# EAGLE board MD-board (EAGLE 9.6.2)
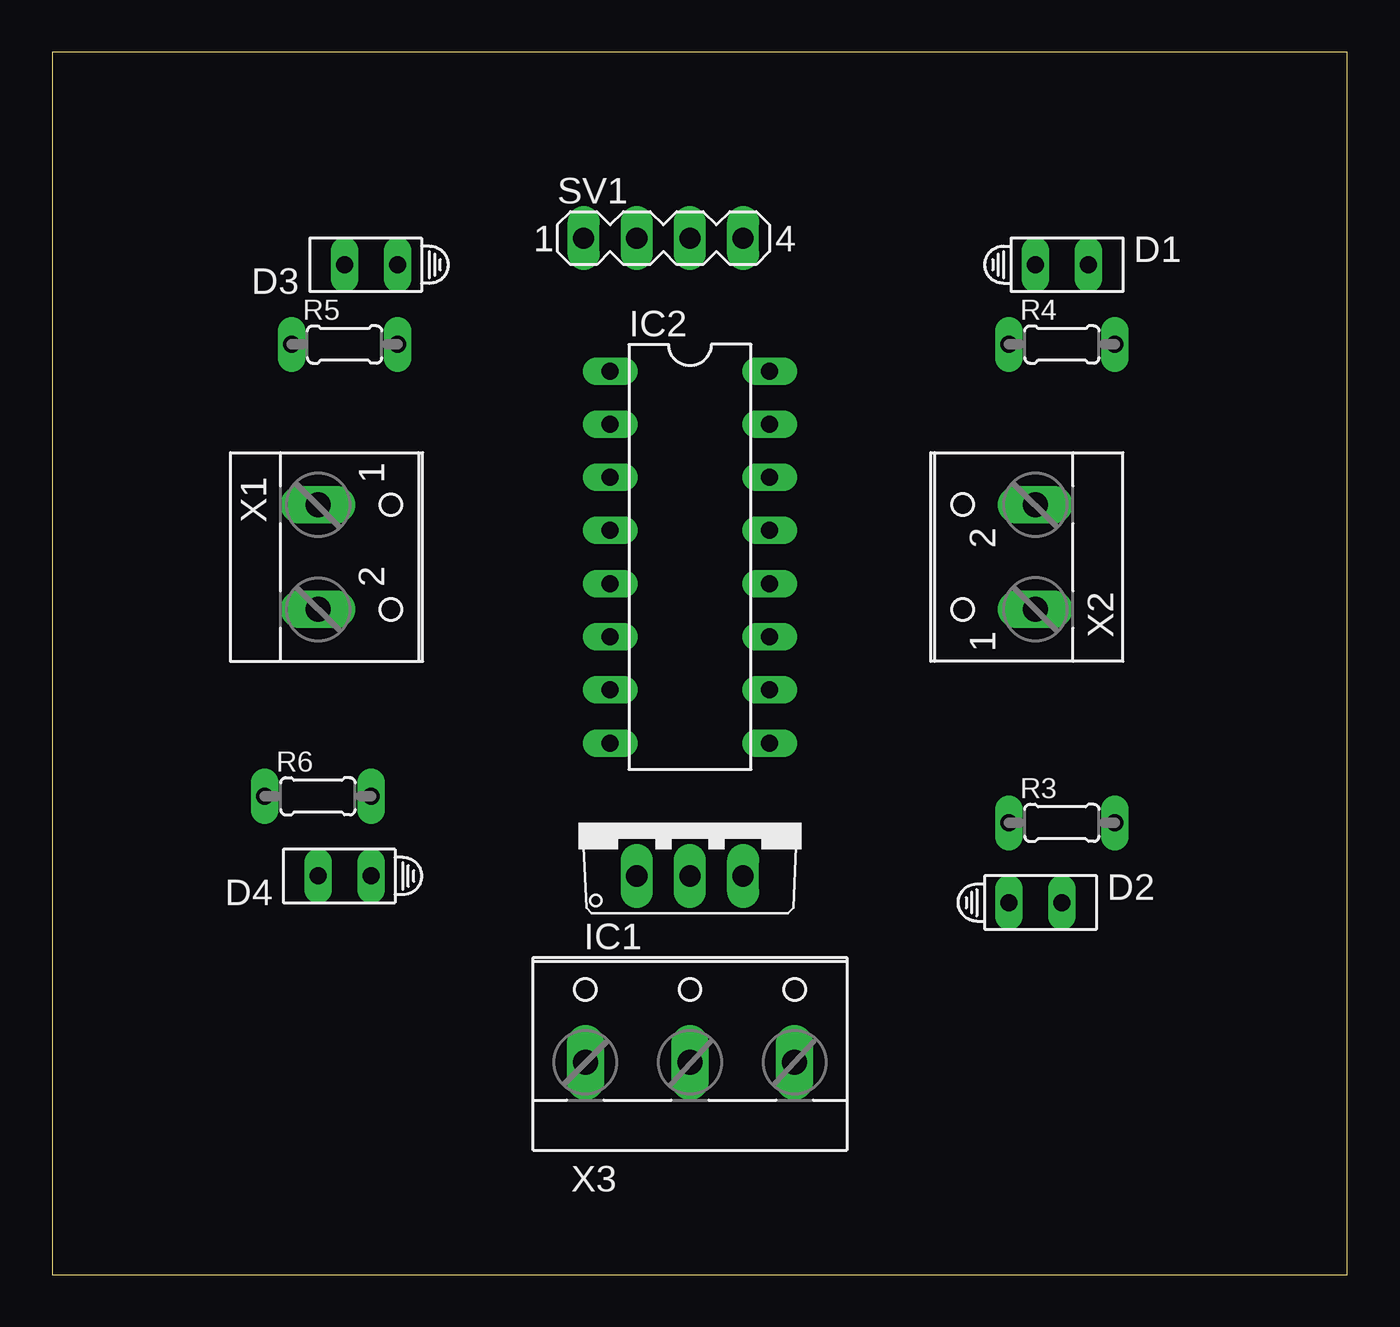
[diagram p0: board, top side]
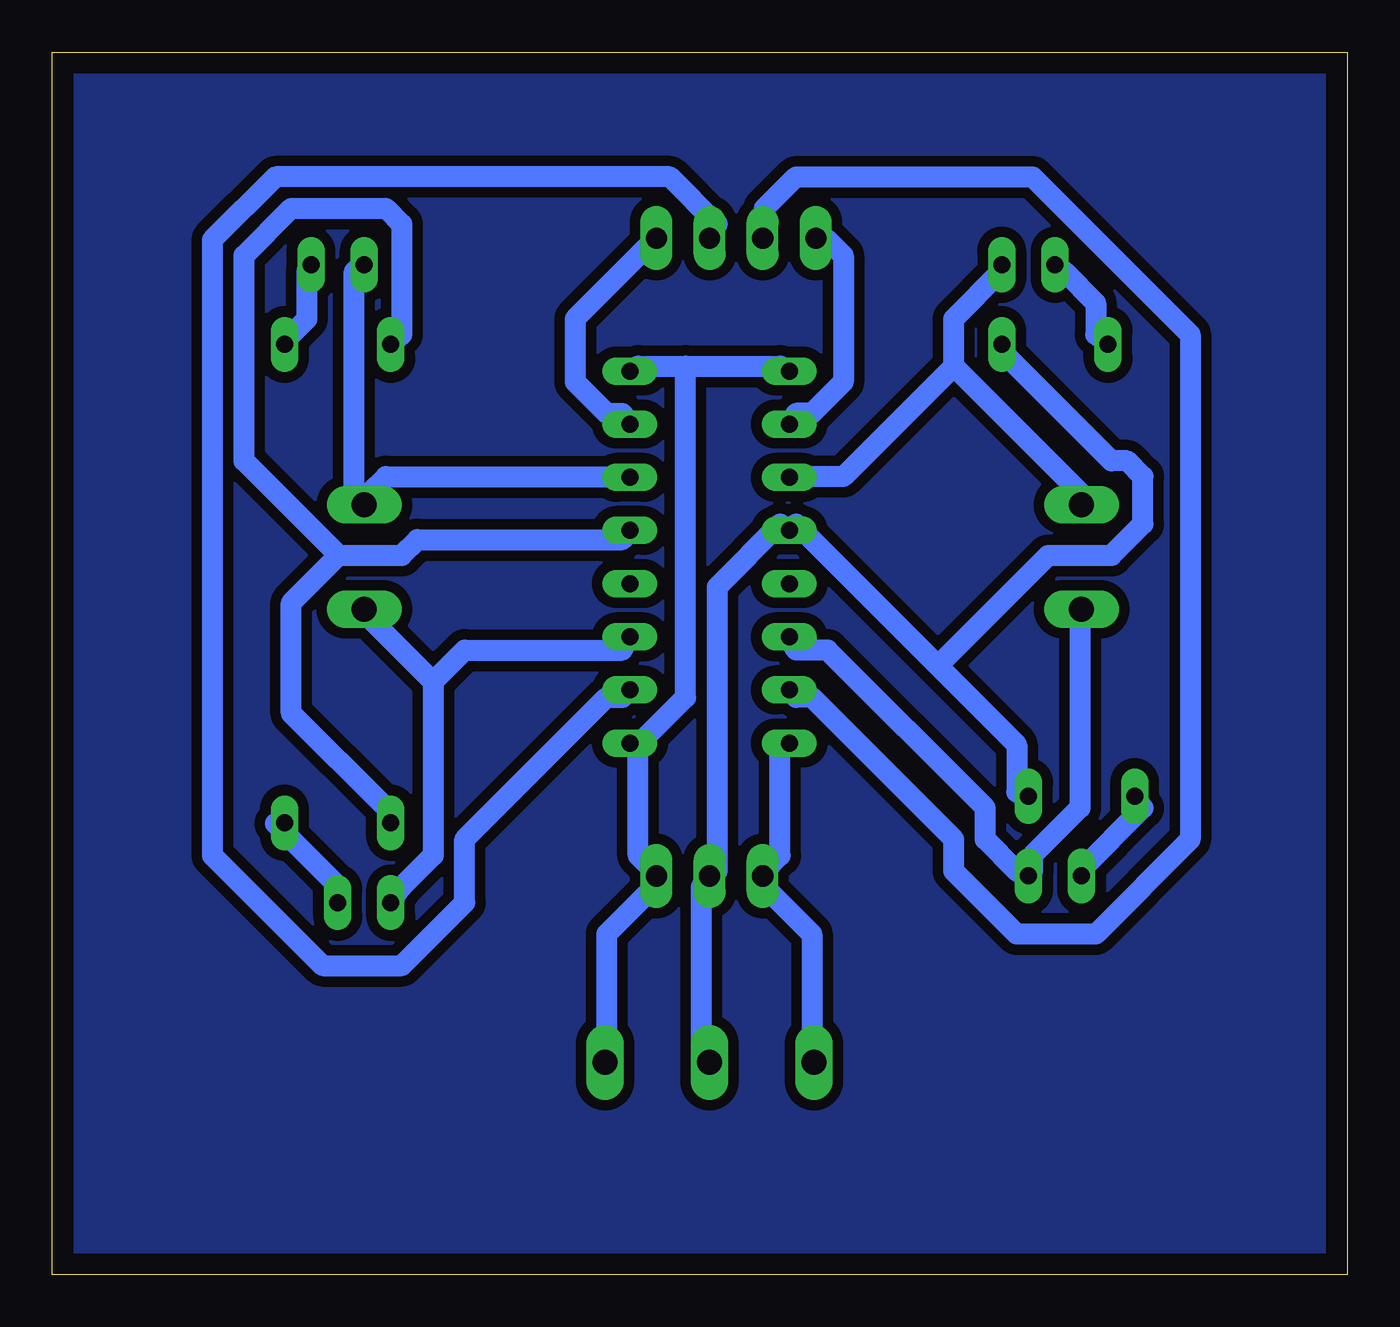
[diagram p1: board, bottom side, seen from below]

Size 61.9 x 58.41 mm. Coordinates in mm from the lower left corner, seen from the top.
Outline: 0,0 61.9,0 61.9,58.41 0,58.41 0,0
Copper layers (1*16): Top 0.035mm / dielectric 1.5mm / Bottom 0.035mm
Design rules "default *": minimum track width 20mil, minimum drill 0.35mm, track to track 20mil, track to pad 20mil, pad to pad 20mil, via to via 20mil, smd to smd 6mil, copper to edge 40mil, drill to drill 6mil, minimum pad ring 10mil, minimum via ring 8mil, stop-mask expansion 4mil, vias tented up to drill 0mil, thermal gap 10mil
Net classes: 0 default: width 1 mm, clearance 0.508 mm

## Footprints (pad centres in the part's own frame; a part is rotated, then mirrored left to right if it is on the bottom)
HLMP6 = drill 0.813 long: A -1.27,0; K 1.27,0
TO220V = drill 1.016 long: 1 -2.54,-2.54; 2 0,-2.54; 3 2.54,-2.54
DIL16 = drill 0.813 long: 1 -8.89,-3.81; 2 -6.35,-3.81; 3 -3.81,-3.81; 4 -1.27,-3.81; 5 1.27,-3.81; 6 3.81,-3.81; 7 6.35,-3.81; 8 8.89,-3.81; 9 8.89,3.81; 10 6.35,3.81; 11 3.81,3.81; 12 1.27,3.81; 13 -1.27,3.81; 14 -3.81,3.81; 15 -6.35,3.81; 16 -8.89,3.81
0204/5 = drill 0.813 long: 1 -2.54,0; 2 2.54,0
MA04-1 = drill 1.016 long: 1 -3.81,0; 2 -1.27,0; 3 1.27,0; 4 3.81,0
W237-102 = drill 1.194 long: 1 -2.5,-1.27; 2 2.5,-1.27
W237-103 = drill 1.194 long: 1 -5,-1.29; 2 0,-1.29; 3 5,-1.29

## Placement (x,y rotation side)
D1  HLMP6  [HLMP6]  48.26,48.26 0 top
D2  HLMP6  [HLMP6]  46.99,17.78 0 top
D3  HLMP6  [HLMP6]  15.24,48.26 180 top
D4  HLMP6  [HLMP6]  13.97,19.05 180 top
IC1  7805TV  [TO220V]  30.48,21.59 0 top
IC2  L293D  [DIL16]  30.48,34.29 270 top
R3  [0204/5]  48.26,21.59 0 top
R4  [0204/5]  48.26,44.45 0 top
R5  [0204/5]  13.97,44.45 0 top
R6  [0204/5]  12.7,22.86 0 top
SV1  [MA04-1]  29.21,49.53 0 top
X1  [W237-102]  13.97,34.29 270 top
X2  [W237-102]  45.72,34.29 90 top
X3  [W237-103]  30.48,11.43 0 top

## Library data of the parts
D1-D4 = display-hp; MF: AGILENT TECHNOLOGIES; MPN: HLMP-6500; OC_FARNELL: 1652490; OC_NEWARK: 40K0088
IC1 = linear
IC2 = st-microelectronics; MPN: L293D; OC_FARNELL: 9589619; OC_NEWARK: 56P8249
R3-R6 = rcl; SPICEPREFIX: R
SV1 = con-lstb; OC_FARNELL: unknown; OC_NEWARK: unknown
X1 X2 = con-wago-500; MPN: 237-102; OC_FARNELL: unknown; OC_NEWARK: 70K9898
X3 = con-wago-500; MPN: 237-103; OC_FARNELL: unknown; OC_NEWARK: 18M7116

## Nets
5V: IC1.3 IC2.1 IC2.9 IC2.16 X3.3
12V: IC1.1 IC2.8 X3.1
GND: IC1.2 IC2.4 R5.2 R6.2 X3.2
IN1: IC2.2 SV1.1
IN2: IC2.7 SV1.2
IN3: IC2.10 SV1.3
IN4: IC2.15 SV1.4
N$1: D1.K R4.2
N$2: D1.A IC2.14 X2.2
N$3: IC2.12
N$4: IC2.5
N$5: IC2.13 R3.1 R4.1
N$6: D2.K R3.2
N$7: D3.K R5.1
N$8: D4.A IC2.6 X1.2
N$9: D4.K R6.1
OUT1: D3.A IC2.3 X1.1
OUT4: D2.A IC2.11 X2.1

## Tracks (layer width: path | path; a pad name or v marks a point on that pad's centre or on a via)
5V
  Bottom 1: 31.63,43.41 33.89,43.41 IC2.16 | 31.63,43.41 27.1,43.41 IC2.1 | 33.89,25.32 33.89,20.04 33.14,19.29 IC1.3 33.14,18.53 35.4,16.27 35.4,10.24 X3.3 | 31.63,43.41 31.63,27.58 33.89,25.32 | 33.89,25.32 IC2.9
12V
  Bottom 1: IC2.8 27.1,25.32 27.1,20.04 27.86,19.29 IC1.1 27.86,18.53 25.6,16.27 25.6,10.24 X3.1
GND
  Bottom 1: X3.2 30.87,10.24 30.87,18.53 IC1.2 30.12,19.29 30.12,32.86 27.1,35.87 IC2.4 26.35,35.87 19.56,29.09 | 19.56,29.09 15.79,25.32 15.79,23.06 R6.2 | 19.56,29.09 14.29,34.37 11.27,34.37 9.76,35.87 9.76,38.14 10.52,38.89 11.27,38.89 16.55,44.17 R5.2
GND0
  pour Bottom: 0,0 0,58.42 62.23,58.42 62.23,0
IN1
  Bottom 1: IC2.2 26.35,41.15 25.6,41.15 24.09,42.66 24.09,48.69 24.84,49.45 SV1.1
IN2
  Bottom 1: IC2.7 26.35,27.58 25.6,27.58 18.81,20.79 18.81,19.29 15.79,16.27 12.02,16.27 7.5,20.79 7.5,44.92 15.04,52.46 26.35,52.46 27.86,50.95 27.86,50.2 SV1.2
IN3
  Bottom 1: IC2.10 34.64,27.58 35.4,27.58 42.18,20.79 42.18,17.78 45.2,14.76 48.97,14.76 54.25,20.04 54.25,49.45 51.23,52.46 32.38,52.46 30.12,50.2 SV1.3
IN4
  Bottom 1: IC2.15 34.64,41.15 35.4,41.15 36.91,42.66 36.91,45.68 33.14,49.45 SV1.4
N$1
  Bottom 1: D1.K 49.72,47.94 49.72,45.68 50.48,44.92 R4.2
N$2
  Bottom 1: IC2.14 34.64,38.14 45.95,38.14 46.71,37.38 X2.2 47.46,37.38 47.46,47.94 D1.A
N$5
  Bottom 1: 48.22,34.37 45.2,34.37 44.45,35.12 34.64,35.12 IC2.13 | 48.22,34.37 50.48,32.1 50.48,26.83 45.95,22.3 R3.1 | 48.22,34.37 52.74,38.89 52.74,48.69 50.48,50.95 45.95,50.95 45.2,50.2 45.2,44.92 R4.1
N$6
  Bottom 1: D2.K 48.22,18.53 51.23,21.55 R3.2
N$7
  Bottom 1: R5.1 12.02,44.92 12.02,46.43 13.53,47.94 D3.K
N$8
  Bottom 1: X1.2 12.78,31.35 12.78,22.3 15.04,20.04 15.04,19.29 D4.A 15.79,19.29 17.3,20.79 17.3,22.3 24.84,29.84 26.35,29.84 IC2.6
N$9
  Bottom 1: D4.K 12.78,19.29 9.76,22.3 R6.1
OUT1
  Bottom 1: 18.81,43.41 18.81,45.68 16.55,47.94 D3.A | 18.81,43.41 12.78,37.38 X1.1 | 18.81,43.41 24.09,38.14 26.35,38.14 IC2.3
OUT4
  Bottom 1: 43.69,28.33 43.69,20.04 45.2,18.53 D2.A | 43.69,28.33 46.71,31.35 X2.1 | 43.69,28.33 42.18,29.84 34.64,29.84 IC2.11